# Altium PCB 3 motors 1 board.PcbDoc (part 1 of 2)
Units mil, origin at the board's own origin, x right, y up, seen from the top; angles counter-clockwise.
Board outline 3920 x 3290 mil, 4 copper layers (Top Layer, GND, PWR, Bottom Layer), stack 37.817 mil thick; 72 components, 81 nets, 316 pads, 112 vias.
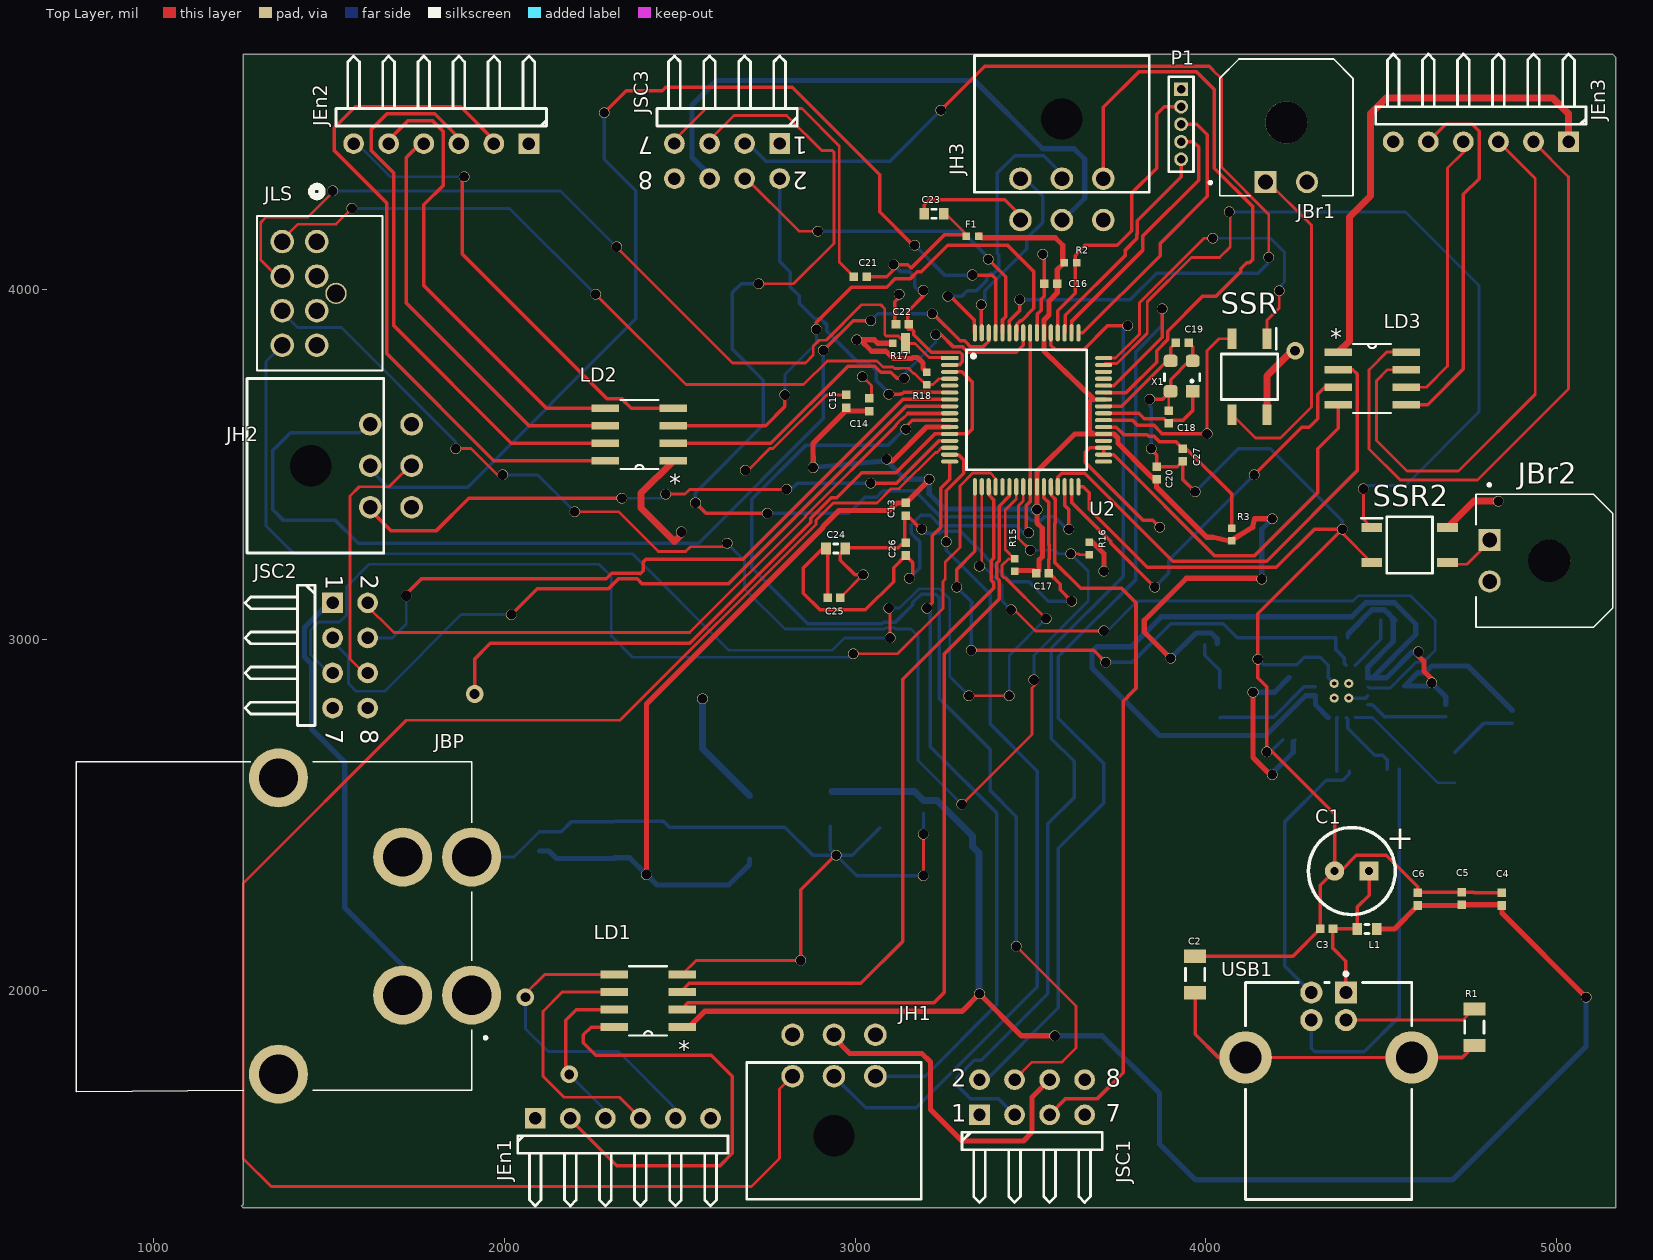
[diagram p0: Top Layer view]
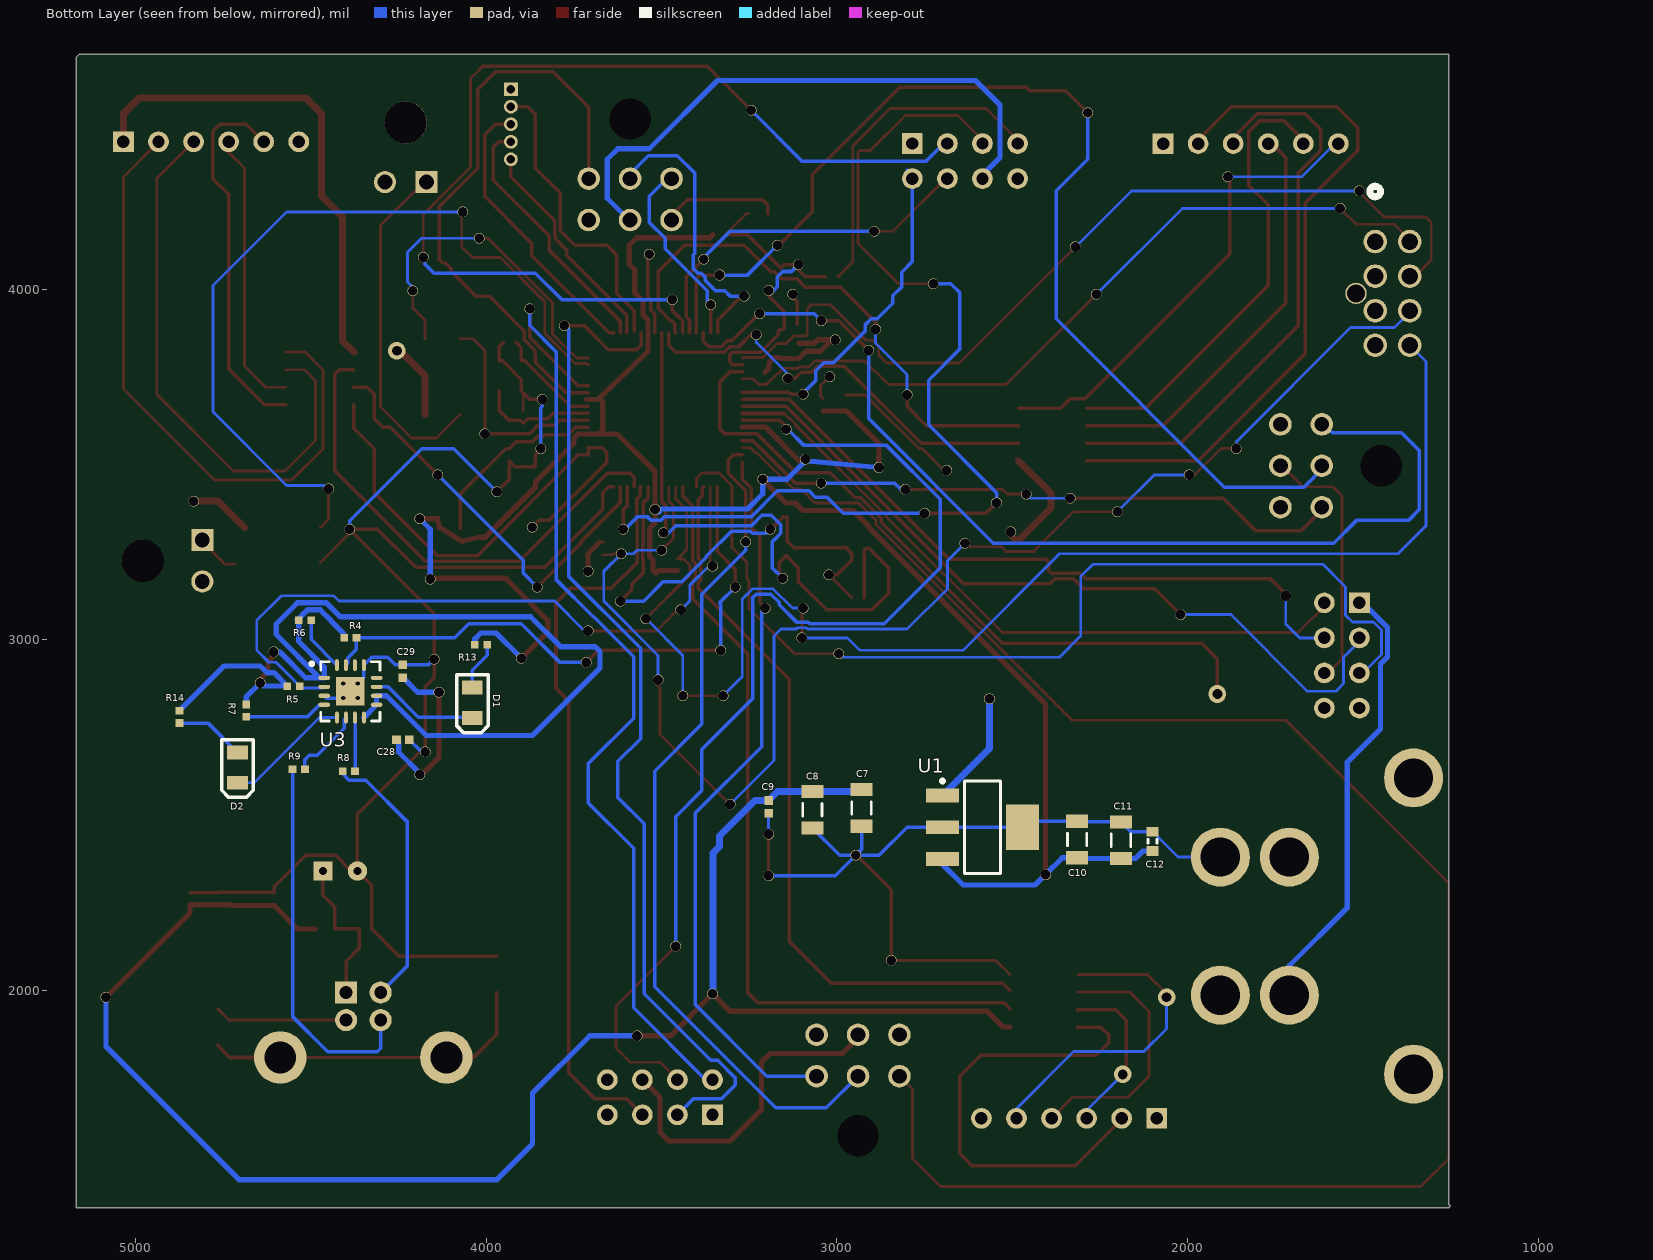
[diagram p1: Bottom Layer view, seen from below]
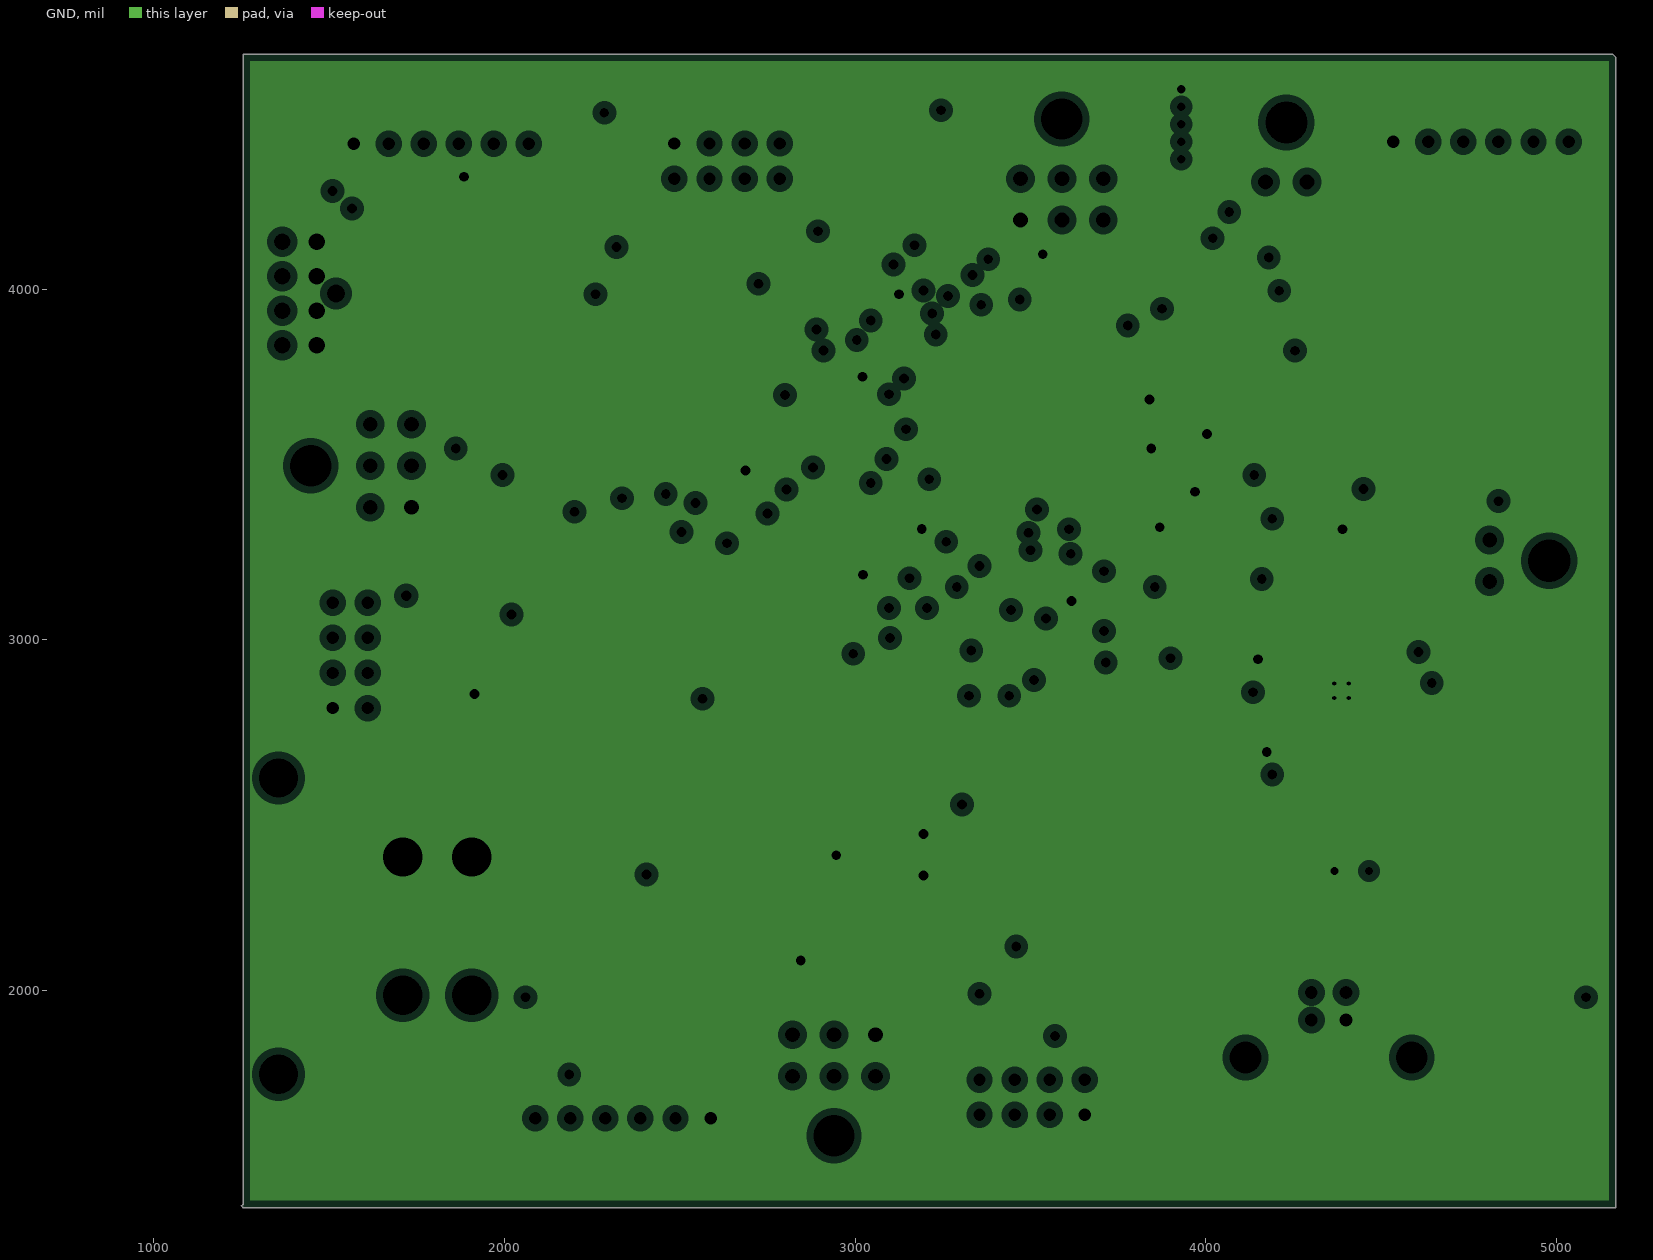
[diagram p2: GND, clearances drawn from the general rule]
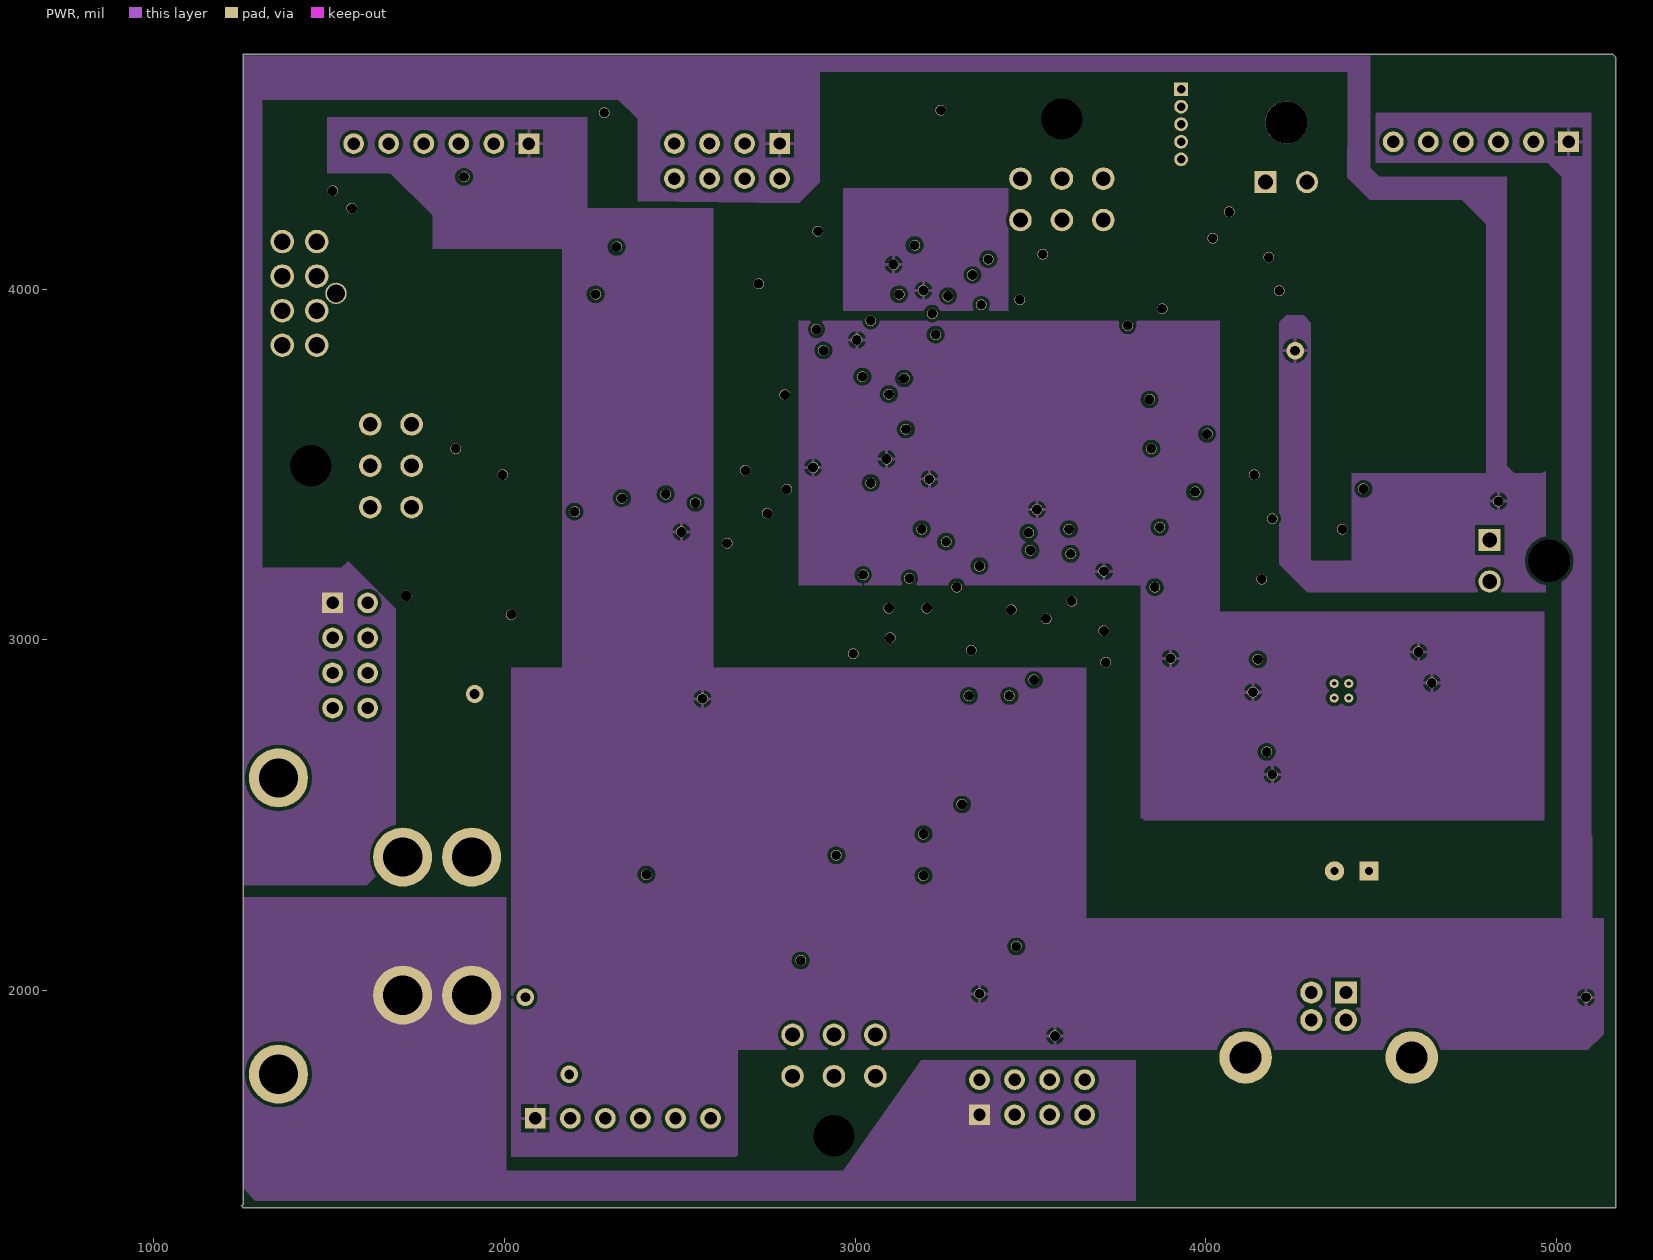
[diagram p3: PWR]
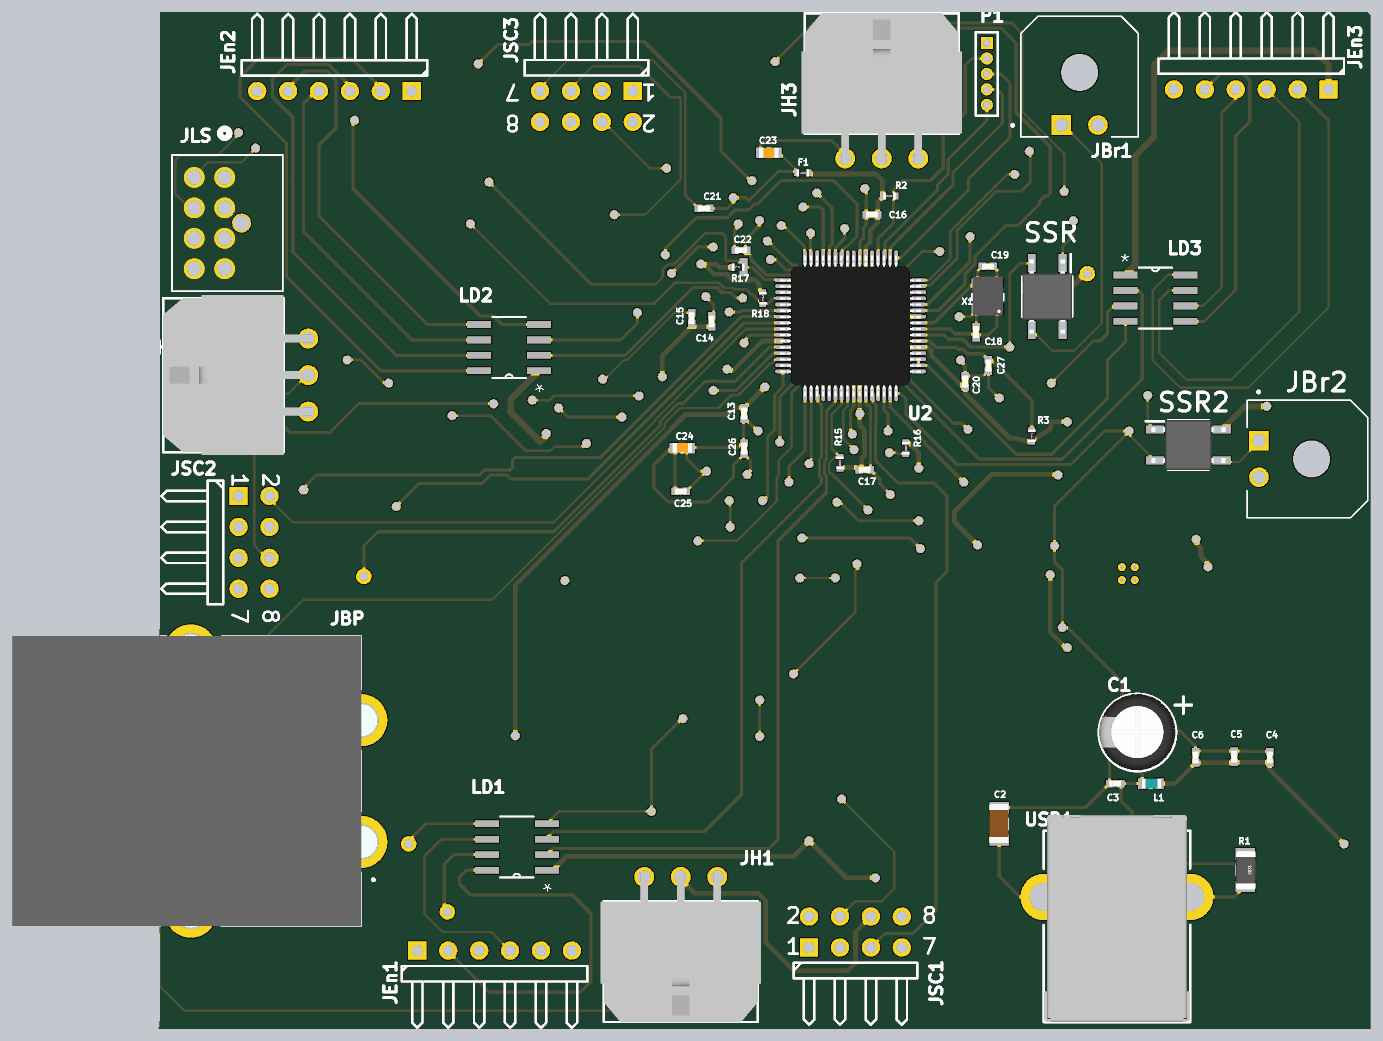
[diagram p5: 3D render of the assembled board from above, using the file's embedded part models]
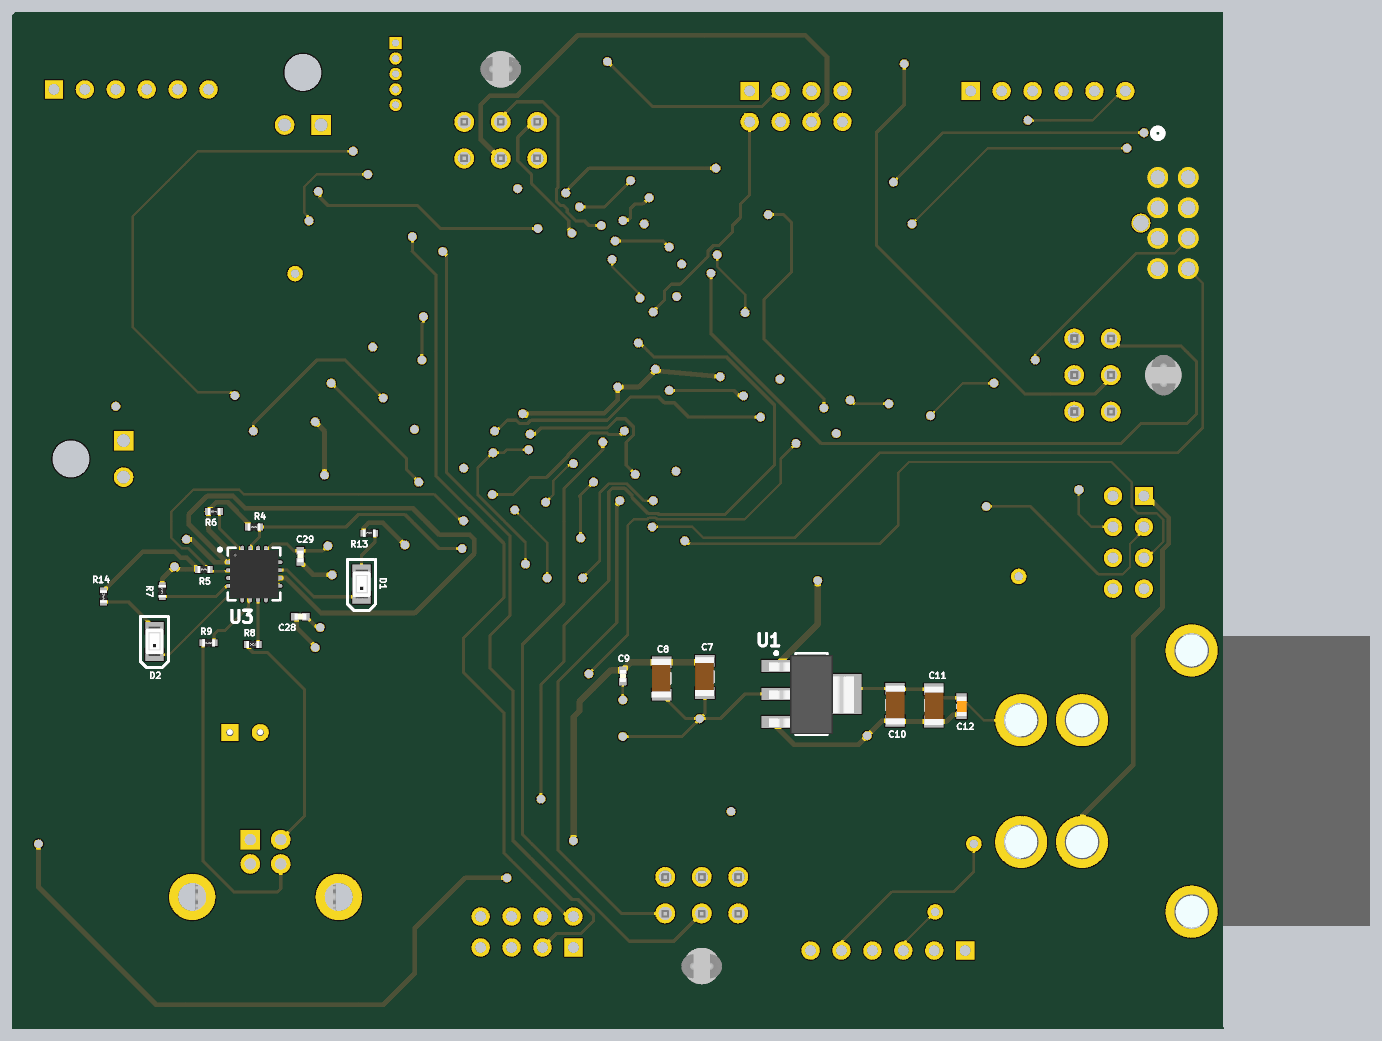
[diagram p6: 3D render of the assembled board from below, using the file's embedded part models]

## Layer stack, top to bottom
Top Solder: solder mask 0.4, Solder Resist, Dk 3.5
Top Layer: signal copper 1.4
Dielectric 3: dielectric 10, Dk 4.2
GND: plane copper 1, net GND
Dielectric 1: dielectric 12.6, FR-4, Dk 4.8
PWR: signal copper 1.417
Dielectric 2: dielectric 10, Dk 4.2
Bottom Layer: signal copper 1.4
Bottom Solder: solder mask 0.4, Solder Resist, Dk 3.5

## Board outline
1255,4670 5160,4670 5170,4660 5170,1380 1255,1380 1250,1385 1255,1390

## Design rules (kind name [scope] priority, off if disabled: settings)
Clearance Clearance_1 [All] p1: gap=10 ignorepadtopadclearanceinfootprint=TRUE except(0: Arc-Hole Track-Hole SMDPad-Hole THPad-Hole Via-Hole Fill-Hole Poly-Hole Region-Hole Text-Hole; 6: Arc-Arc Arc-Track Arc-SMDPad Arc-THPad Track-Track Track-SMDPad Track-THPad SMDPad-SMDPad SMDPad-THPad THPad-THPad)
Clearance [All] p2: gap=10 ignorepadtopadclearanceinfootprint=TRUE except(0: Arc-Hole Track-Hole SMDPad-Hole THPad-Hole Via-Hole Fill-Hole Poly-Hole Region-Hole Text-Hole; 6: Arc-Arc Arc-Track Arc-SMDPad Arc-THPad Track-Track Track-SMDPad Track-THPad SMDPad-SMDPad SMDPad-THPad THPad-THPad)
MinimumSolderMaskSliver [All] p1: minsoldermaskwidth=2
PlaneClearance [All] p1: clearance=20
PlaneConnect [All] p1: planeconnectstyle=Relief reliefexpansion=10 reliefentries=4 reliefconductorwidth=10 reliefairgap=8
PolygonConnect PolygonConnect_2 [All vs IsNamedPolygon('PWR-+24V')] p1: connectstyle=Direct reliefconductorwidth=10 reliefentries=4 polygonreliefangle="90 Angle" airgapwidth=10
PolygonConnect PolygonConnect_1 [All vs IsNamedPolygon('PWR-+24V 1')] p2: connectstyle=Direct reliefconductorwidth=10 reliefentries=4 polygonreliefangle="90 Angle" airgapwidth=10
PolygonConnect [All] p3: connectstyle=Relief reliefconductorwidth=10 reliefentries=4 polygonreliefangle="90 Angle" airgapwidth=10
RoutingVias [All] p1: holewidth=28 width=30 viastyle="Through Hole" minholewidth=28 minwidth=30 maxholewidth=28 maxwidth=50
SilkToSilkClearance [All] p1: silktosilkclearance=2
SilkToSolderMaskClearance [IsPad] p1: minsilkscreentomaskgap=2 clearancetoexposedcopper=TRUE
SolderMaskExpansion [All] p1: expansion=4
Width [All] p1: maxlimit=20 minlimit=6 preferedwidth=10 toplayer_prefwidth=8 midlayer1_minwidth=10 bottomlayer_prefwidth=8 minimp=50.000000 maximp=50.000000 favimp=50.000000
25 further rules are at their usual default settings.

## Components (designator, comment, footprint, x,y, rotation, side; value= is the part's Value field where it differs from the comment)
C1 "100uF" CapAlu6.3mmx12.5mm 4416.89,2340 r0 top
C2 "10nF" CAP_1206 3970,2045 r270 top
C3 "10nF" CAP_0402_M 4345,2175 r0 top
C4 "100nF" CAP_0402_M 4845,2260 r270 top
C5 "2.2uF" CAP_0402_M 4730,2261.89 r270 top
C6 "2.2uF" CAP_0402_M 4605,2260 r270 top
C7 "100uF" CAP_1206 2930,2520 r270 bottom
C8 "100uF" CAP_1206 3070,2515 r270 bottom
C9 "1uF" CAP_0402_M 3195,2523.11 r90 bottom
C10 "100uF" CAP_1206 2315,2430 r90 bottom
C11 "100uF" CAP_1206 2190,2427.83 r90 bottom
C12 "10uF" CAP_0603 2100,2425 r90 bottom
C13 "10nF" CAP_0402_M 3145,3371.89 r90 top
C14 "100nF" CAP_0402_M 3040,3670 r270 top
C15 "100nF" CAP_0402_M 2975,3680 r270 top
C16 "10nF" CAP_0402_M 3558.39,4015 r0 top
C17 "100nF" CAP_0402_M 3535,3190 r180 top
C18 "13pF" CAP_0402_M 3895,3635 r270 top
C19 "13pF" CAP_0402_M 3933.11,3847.4 r180 top
C20 "100nF" CAP_0402_M 3860,3475 r270 top
C21 "10nF" CAP_0402_M 3015,4035 r0 top
C22 "100nF" CAP_0402_M 3134.92,3900 r0 top
C23 "10uF" CAP_0603 3225,4215 r0 top
C24 "2.2uF" CAP_0603 2945,3260 r180 top
C25 "1uF" CAP_0402_M 2940,3120 r180 top
C26 "100nF" CAP_0402_M 3145,3258.11 r270 top
C27 "100nF" CAP_0402_M 3935,3526.89 r90 top
C28 "100nF" CAP_0402_M 4238.11,2715 r0 bottom
C29 "100nF" CAP_0402_M 4238.11,2910 r270 bottom
D1 "Led Red" "TOPLED 0805" 4040,2820 r270 bottom
D2 "Led Red" "TOPLED 0805" 4710,2635 r270 bottom
F1 "550mA" RES_0402_M#1 3335,4150 r180 top
JBP "42820-2224" 428202224 1906.85,1986.3 r270 top
JBr1 "436500200" MOLEX_436500200 4230.04,4461.22 r180 top
JBr2 "436500200" MOLEX_436500200 4966.22,3225 r90 top
JEn1 "EN_A" HDR1X6H 2088,1635 r0 top
JEn2 "EN_A" HDR1X6H 2070,4414.68 r180 top
JEn3 "EN_A" HDR1X6H 5035,4420 r180 top
JH1 "43045-0600" 43045-0600 2940,1585 r0 top
JH2 "43045-0600" 43045-0600 1447.13,3495.98 r270 top
JH3 "43045-0600" 43045-0600 3590,4484.88 r180 top
JLS "105310-1108" 105310-1108_MOL 1465,4135.28 r270 top
JSC1 "43045-0800" HDR2X4H 3355,1645 r0 top
JSC2 "43045-0800" HDR2X4H 1510,3105 r270 top
JSC3 "43045-0800" HDR2X4H 2785,4415 r180 top
L1 "200R" IND_0603 4460,2175 r0 top
LD1 "SN75LBC179D" D8 2410,1970 r180 top
LD2 "SN75LBC179D" D8 2385,3585 r180 top
LD3 "SN75LBC179D" D8 4475,3745 r0 top
P1 "MHDR1X5" MHDR1X5 3930,4570 r270 top
R1 "1M" RES_1206 4766.22,1895 r270 top
R2 "10k" RES_0402_M#1 3615,4075 r0 top
R3 "10k" RES_0402_M#1 4075,3300 r90 top
R4 "10k" RES_0402_M#1 4388.11,3005 r0 bottom
R5 "10k" RES_0402_M#1 4550,2867.65 r0 bottom
R6 "10k" RES_0402_M#1 4517.28,3055 r0 bottom
R7 "10k" RES_0402_M#1 4685,2797.28 r90 bottom
R8 "27" RES_0402_M#1 4392.28,2625 r180 bottom
R9 "27" RES_0402_M#1 4535,2630 r180 bottom
R13 "120" RES_0402_M#1 4015,2985 r0 bottom
R14 "120" RES_0402_M#1 4875,2780 r90 bottom
R15 "150" RES_0402_M#1 3455,3212.76 r270 top
R16 "150" RES_0402_M#1 3667.72,3260 r90 top
R17 "150" RES_0402_M#2 3125.84,3845 r180 top
R18 "150" RES_0402_M#1 3205,3745 r90 top
SSR "CPC1017NTR" SOP254P610X216-4N 4125,3750 r270 top
SSR2 "CPC1017NTR" SOP254P610X216-4N 4581.73,3270 r0 top
U1 "MCP1825S-3302E/DB" SOT230P700X180-4N 2585,2465 r180 bottom
U2 "TM4C123GH6PMI" TSQFP50P1200X1200X120-64N 3341.85,3875 r0 top
U3 "FT230XQ" QFN65P400X400X80_HS-17N 4387.79,2852.67 r180 bottom
USB1 "USB type-B jack" USB2.5-2H4E 4350.79,1954.37 r270 top
X1 "CRYSTAL 16MHZ" CRYSTAL_3.2x2.5 3962.99,3708.39 r180 top

## Footprints (in the part's own frame and the unit in brackets; to place one, negate y for a bottom-side part, rotate by r counter-clockwise, add the part's x,y. Pads: shape width x height; smd on the part's side, far side on the other; paste and mask are expansions set on the pad)
43045-0600 [mm]
  round 1.63 hole 1.07: 1(-3,4.32) 2(0,4.32) 3(3,4.32) 4(3,7.32) 5(0,7.32) 6(-3,7.32)
  round 0 hole 3 unplated: 7(0,0)
  silkscreen extent -6.32,-4.6 6.32,5.31, body extent -6.58,-4.62 6.58,7.62, height 8.66
105310-1108_MOL [mil]
  round 67 hole 47 mask+0: 1(0,0) 2(98.43,0) 3(196.85,0) 4(295.28,0) 5(0,-98.43) 6(98.43,-98.43) 7(196.85,-98.43) 8(295.28,-98.43)
  round 61 hole 51: 9(147.64,54.72)
  silkscreen extent -158,-170 368,188, body extent 0,0 10,10, height 10
428202224 [mm]
  round 4.275 hole 2.85: 1(0,0) 2(0,-5) 3(-10,0) 4(-10,-5) MH1(-15.73,-14) MH2(5.73,-14)
  silkscreen extent -16.91,-28.66 7,1.1, body extent -17.04,-28.66 7.06,1.32, height 14.2
CAP_0402_M [mm] "Chip Capacitor, 2-Leads, Body 1.00x0.50mm, IPC Medium Density"
  rect 0.62x0.62 smd: 1(-0.46,0) 2(0.46,0)
  body extent -0.5,-0.26 0.5,0.27, height 0.36
CAP_0603 [mm] "Chip Capacitor, 2-Leads, Body 1,6x0,8mm, IPC High Density"
  rect 0.7x0.85 smd: 1(-0.7,0) 2(0.7,0)
  silkscreen extent -0.15,-0.33 0.15,0.33, body extent -0.8,-0.42 0.8,0.38, height 0.7
CAP_1206 [mm] "Chip Capacitor, 2-Leads, Body 3,1x1,6mm, IPC High Density"
  rect 0.95x1.6 smd: 1(-1.325,0) 2(1.325,0)
  silkscreen extent -0.45,-0.7 0.45,0.7, body extent -1.62,-0.82 1.57,0.78, height 1.6
CapAlu6.3mmx12.5mm [mm] "Capacitor Aluminum 6.3mm OD"
  rect 1.4x1.4 hole 0.6: 1(1.25,0)
  round 1.4 hole 0.6: 2(-1.25,0)
  silkscreen extent -3.15,-3.15 3.15,3.15, body extent -3.15,-3.11 3.15,3.19, height 12
CRYSTAL_3.2x2.5 [mm]
  rect 1x0.9 smd: 1(0,0)
  rrect50% 1x0.9 smd: 2(0,-2.2) 3(1.6,-2.2) 4(1.6,0)
  silkscreen extent -0.51,-1.27 2.03,-0.69, body extent -0.5,-2.7 2,0.5, height 0.93
D8 [mil]
  rect 78x22 smd: 1(-97,75) 2(-97,25) 3(-97,-25) 4(-97,-75) 5(97,-75) 6(97,-25) 7(97,25) 8(97,75)
  silkscreen extent -54,-98 54,98, body extent 0,0 10,10, height 10
HDR1X6H [mm] "Connector; Header; 6 Position; Right Angle"
  rect 1.5x1.5 hole 0.9: 1(0,0)
  round 1.5 hole 0.9: 2(2.54,0) 3(5.08,0) 4(7.62,0) 5(10.16,0) 6(12.7,0)
  silkscreen extent -1.27,-6.35 13.97,-1.27
HDR2X4H [mm] "Connector; Header; 4x2 Position; Right Angle"
  rect 1.5x1.5 hole 0.9: 1(0,0)
  round 1.5 hole 0.9: 2(0,2.54) 3(2.54,0) 4(2.54,2.54) 5(5.08,0) 6(5.08,2.54) 7(7.62,0) 8(7.62,2.54)
  silkscreen extent -1.27,-6.35 8.89,-1.27
IND_0603 [mm]
  rect 0.7x0.85 smd: 1(-0.7,0) 2(0.7,0)
  silkscreen extent -0.15,-0.33 0.15,0.33, body extent -0.74,-0.4 0.86,0.4, height 0.95
MHDR1X5 [mm] "Connector; Header; 5 Position"
  rect 1x1 hole 0.6: 1(0,0)
  round 1 hole 0.6: 2(1.27,0) 3(2.54,0) 4(3.81,0) 5(5.08,0)
  silkscreen extent -0.9,-0.9 5.98,0.9
MOLEX_436500200 [mm]
  rect 1.605x1.605 hole 1.07: 1(1.5,3.97)
  round 1.605 hole 1.07: 2(-1.5,3.97)
  round 3.05 hole 3.05 unplated: ""(0,-0.35)
  silkscreen extent -4.82,-4.95 5.6,4.95
QFN65P400X400X80_HS-17N [mm] "QFN, 16-Leads, Body 4.00x4.00mm, Pitch 0.65mm, Thermal Pad 2.08x2.08mm, IPC Medium Density"
  oval 0.85x0.3 smd: 1(-1.9,0.975) 2(-1.9,0.325) 3(-1.9,-0.325) 4(-1.9,-0.975) 9(1.9,-0.975) 10(1.9,-0.325) 11(1.9,0.325) 12(1.9,0.975)
  oval 0.3x0.85 smd: 5(-0.975,-1.9) 6(-0.325,-1.9) 7(0.325,-1.9) 8(0.975,-1.9) 13(0.975,1.9) 14(0.325,1.9) 15(-0.325,1.9) 16(-0.975,1.9)
  round 0.66 hole 0.305: 17(-0.516,-0.493) 17(-0.516,0.567) 17(0.538,-0.493) 17(0.538,0.567)
  rect 2.08x2.08 smd: 17(0,0)
  silkscreen extent -2.93,-2.15 2.15,2.15, body extent -2,-2 2,2, height 0.92
RES_0402_M#1 [mm] "Chip Resistor, 2-Leads, Body 1.00x0.50mm, IPC Medium Density"
  rect 0.55x0.55 smd: 1(-0.45,0) 2(0.45,0)
  body extent -0.52,-0.3 0.52,0.3, height 0.34
RES_0402_M#2 [mm] "Chip Resistor, 2-Leads, Body 1.00x0.50mm, IPC Medium Density"
  rect 0.65x1.5 smd: 1(-0.45,0)
  rect 0.55x0.55 smd: 2(0.45,0)
  body extent -0.52,-0.3 0.52,0.3, height 0.34
RES_1206 [mm] "Chip Resistor 2-Leads, Body 3,1x1,6mm, IPC High Density"
  rect 0.95x1.6 smd: 1(-1.325,0) 2(1.325,0)
  silkscreen extent -0.45,-0.7 0.45,0.7, body extent -1.59,-0.76 1.61,0.84, height 1
SOP254P610X216-4N [mm]
  rect 1.5x0.65 smd: 1(-2.75,1.27) 2(-2.75,-1.27) 3(2.75,-1.27) 4(2.75,1.27)
  silkscreen extent -3.5,-2.04 1.65,2.04, body extent -3.05,-2.04 3.05,2.04, height 2.16
SOT230P700X180-4N [mm] "SOT223, 4-Leads, Body 6,7x7,3mm (max), Pitch 2,30mm, IPC Medium Density"
  rect 2.4x1 smd: 1(-2.9,2.3) 2(-2.9,0) 3(-2.9,-2.3)
  rect 2.4x3.3 smd: 4(2.9,0)
  silkscreen extent -3.03,-3.35 1.3,3.47, body extent -3.5,-3.3 3.5,3.2, height 1.69
"TOPLED 0805" [mm]
  rect 1x1.5 smd: 1(-1.1,0) 2(1.1,0)
  silkscreen extent -2.03,-1.14 2.16,1.14, body extent -1.2,-0.74 1.2,0.76, height 1.45
TSQFP50P1200X1200X120-64N [mm] "TSQFP, 64-Leads, Body 12,0x12,0mm (max), Pitch 0,50mm, IPC Medium Density"
  rect 1.25x0.3 smd: 1(-1.825,-1.825)
  oval 1.25x0.3 smd: 2(-1.825,-2.325) 3(-1.825,-2.825) 4(-1.825,-3.325) 5(-1.825,-3.825) 6(-1.825,-4.325) 7(-1.825,-4.825) 8(-1.825,-5.325) 9(-1.825,-5.825) 10(-1.825,-6.325) 11(-1.825,-6.825) 12(-1.825,-7.325) 13(-1.825,-7.825) 14(-1.825,-8.325) 15(-1.825,-8.825) 16(-1.825,-9.325) 33(9.325,-9.325) 34(9.325,-8.825) 35(9.325,-8.325) 36(9.325,-7.825) 37(9.325,-7.325) 38(9.325,-6.825) 39(9.325,-6.325) 40(9.325,-5.825) 41(9.325,-5.325) 42(9.325,-4.825) 43(9.325,-4.325) 44(9.325,-3.825) 45(9.325,-3.325) 46(9.325,-2.825) 47(9.325,-2.325) 48(9.325,-1.825)
  oval 0.3x1.25 smd: 17(0,-11.15) 18(0.5,-11.15) 19(1,-11.15) 20(1.5,-11.15) 21(2,-11.15) 22(2.5,-11.15) 23(3,-11.15) 24(3.5,-11.15) 25(4,-11.15) 26(4.5,-11.15) 27(5,-11.15) 28(5.5,-11.15) 29(6,-11.15) 30(6.5,-11.15) 31(7,-11.15) 32(7.5,-11.15) 49(7.5,0) 50(7,0) 51(6.5,0) 52(6,0) 53(5.5,0) 54(5,0) 55(4.5,0) 56(4,0) 57(3.5,0) 58(3,0) 59(2.5,0) 60(2,0) 61(1.5,0) 62(1,0) 63(0.5,0) 64(0,0)
  silkscreen extent -0.6,-9.92 8.1,-1.22, body extent -2.05,-11.38 9.53,0.2, height 1
USB2.5-2H4E [mm] "Connector; USB1.1, Type B, Thru-Hole; 4 Position; Right Angle"
  rect 1.6x1.6 hole 0.92: 1(-1,1.25)
  round 1.6 hole 0.92: 2(-1,-1.25) 3(1,-1.25) 4(1,1.25)
  round 3.8 hole 2.3: 5(3.71,6.02) 6(3.71,-6.02)
  silkscreen extent -2.47,-6.02 13.99,6.02, body extent -3.03,-6 13.97,6, height 10.9

## Part data
C1: library part 100uF_35v_6.3x12.5, "Capacitor 35v 100uF 6.3mm", Capacitance=100µF, ESR (Equivalent Series Resistance)=-, Lifetime @ Temp.="5000 Hrs @ 105°C", Manufacturer=Nichicon, Manufacturer Part Number=UHV1V101MED, Operating Temperature="-40°C ~ 105°C", Package / Case="Radial, Can", Ripple Current="220mA @ 120Hz", Supplier Part Number 1=493-13394-ND, Tolerance=±20%, Voltage Rating=35V, Applications="General Purpose", Category=Capacitors, ComponentLink1Description=http://nichicon-us.com/english/products/pdfs/e-uhv.pdf, ComponentLink1URL=http://nichicon-us.com/english/products/pdfs/e-uhv.pdf, Height - Seated (Max)="0.492\" (12.50mm)", Impedance="100 mOhm", Lead Spacing="0.098\" (2.50mm)", Mounting Type="Through Hole", Packaging=Bulk, Polarization=Polar, Pricing 1="1=0.46, 10=0.32, 25=0.262, 50=0.224, 100=0.1919, 250=0.15992, 500=0.14394, 1000=0.12155, 2500=0.11515 (CAD)", RoHS="RoHS Compliant", Size / Dimension="0.248\" Dia (6.30mm)", Stock 1=5561, Supplier 1=Digi-Key, Surface Mount Land Size=-
C2: library part 10nF_500V_1206, "CAP CER 10000PF 500V X7R 1206", Capacitance=10000pF, Manufacturer="Samsung Electro-Mechanics America, Inc", Manufacturer Part Number=CL31B103KGFNNNE, Operating Temperature="-55°C ~ 125°C", Package / Case="1206 (3216 Metric)", Ratings=-, Supplier Part Number 1=1276-3076-1-ND, Temperature Coefficient=X7R, Tolerance=±10%, Voltage - Rated=500V, Applications="General Purpose", Category=Capacitors, ComponentLink1Description=http://www.samsungsem.com/kr/front/downloadcms.do?path=/kr/support/product-search/mlcc/__icsFiles/afieldfile/2014/11/05&fileName=S_CL31B103KGFNNNE.pdf, ComponentLink1URL=http://www.samsungsem.com/kr/front/downloadcms.do?path=/kr/support/product-search/mlcc/__icsFiles/afieldfile/2014/11/05&fileName=S_CL31B103KGFNNNE.pdf, Features=-, Height - Seated (Max)=-, Lead Spacing=-, Lead Style=-, Mounting Type="Surface Mount, MLCC", Packaging="Cut Tape (CT)", Pricing 1="1=0.34, 10=0.28, 25=0.192, 100=0.1398, 500=0.09266, 1000=0.08216 (CAD)", RoHS="RoHS Compliant", Size / Dimension="0.126\" L x 0.063\" W (3.20mm x 1.60mm)", Stock 1=9075, Supplier 1=Digi-Key, Thickness (Max)="0.055\" (1.40mm)"
C3 C13 C16 C21: library part 10nF_50V_0402, "CAP CER 10000PF 50V 10% X7R 0402", Capacitance=10000pF, Manufacturer=Kemet, Manufacturer Part Number=C0402C103K5RACTU, Operating Temperature="-55°C ~ 125°C", Package / Case="0402 (1005 Metric)", Ratings=-, Supplier Part Number 1=399-3066-1-ND, Temperature Coefficient=X7R, Tolerance=±10%, Voltage - Rated=50V, Applications="General Purpose", Category=Capacitors, ComponentLink1Description=http://www.kemet.com/docfinder?Partnumber=C0402C103K5RACTU, ComponentLink1URL=http://www.kemet.com/docfinder?Partnumber=C0402C103K5RACTU, Features=-, Height - Seated (Max)=-, Lead Spacing=-, Lead Style=-, Mounting Type="Surface Mount, MLCC", Packaging="Cut Tape (CT)", Pricing 1="1=0.14, 10=0.037, 25=0.026, 50=0.0198, 100=0.0166, 250=0.01364, 1000=0.00893, 2500=0.00804, 5000=0.00744 (CAD)", RoHS="RoHS Compliant", Size / Dimension="0.039\" L x 0.020\" W (1.00mm x 0.50mm)", Stock 1=3556921, Supplier 1=Digi-Key, Thickness (Max)="0.022\" (0.55mm)"
C4 C14 C15 C17 C20 C22 C26 C27 C28 C29: library part 100nF_50V_0402, "CAP CER 100NF 50V 20% X5R 0402", Capacitance=0.1µF, Manufacturer="TDK Corporation", Manufacturer Part Number=C1005X5R1H104M050BB, Operating Temperature="-55°C ~ 85°C", Package / Case="0402 (1005 Metric)", Ratings=-, Supplier Part Number 1=445-5943-1-ND, Temperature Coefficient=X5R, Tolerance=±20%, Voltage - Rated=50V, Applications="General Purpose", Category=Capacitors, ComponentLink1Description=http://product.tdk.com/en/catalog/datasheets/mlcc_commercial_general_en.pdf, ComponentLink1URL=http://product.tdk.com/en/catalog/datasheets/mlcc_commercial_general_en.pdf, Features=-, Height - Seated (Max)=-, Lead Spacing=-, Lead Style=-, Mounting Type="Surface Mount, MLCC", Packaging="Cut Tape (CT)", Pricing 1="1=0.18, 10=0.122, 100=0.0579, 250=0.04872, 500=0.0408, 1000=0.03348, 5000=0.02831 (CAD)", RoHS="RoHS Compliant", Size / Dimension="0.039\" L x 0.020\" W (1.00mm x 0.50mm)", Stock 1=218263, Supplier 1=Digi-Key, Thickness (Max)="0.022\" (0.55mm)"
C5 C6: library part 2.2uF_10V_0402, "CAP CER 2.2UF 10V 20% X5R 0402", Capacitance=2.2µF, Manufacturer="Taiyo Yuden", Manufacturer Part Number=LMK105BJ225MV-F, Operating Temperature="-55°C ~ 85°C", Package / Case="0402 (1005 Metric)", Ratings=-, Supplier Part Number 1=587-3153-1-ND, Temperature Coefficient=X5R, Tolerance=±20%, Voltage - Rated=10V, Applications="General Purpose", Category=Capacitors, ComponentLink1Description=http://www.yuden.co.jp/ut/product/category/capacitor/LMK105BJ225MV-F.pdf, ComponentLink1URL=http://www.yuden.co.jp/ut/product/category/capacitor/LMK105BJ225MV-F.pdf, Features=-, Height - Seated (Max)=-, Lead Spacing=-, Lead Style=-, Mounting Type="Surface Mount, MLCC", Packaging="Cut Tape (CT)", Pricing 1="1=0.26, 10=0.173, 50=0.105, 100=0.0881, 250=0.07132, 500=0.0629, 1000=0.05348, 2500=0.04928, 5000=0.04509 (CAD)", RoHS="RoHS Compliant", Size / Dimension="0.039\" L x 0.020\" W (1.00mm x 0.50mm)", Stock 1=258065, Supplier 1=Digi-Key, Thickness (Max)="0.022\" (0.55mm)"
C7 C8 C10 C11: library part 100uF_6.3v_1206_X5R, "CAP CER 100UF 6.3V X5R 1206", Capacitance=100µF, Manufacturer="Murata Electronics North America", Manufacturer Part Number=GRM31CR60J107ME39L, Operating Temperature="-55°C ~ 85°C", Package / Case="1206 (3216 Metric)", Ratings=-, Supplier Part Number 1=490-4539-1-ND, Temperature Coefficient=X5R, Tolerance=±20%, Voltage - Rated=6.3V, Applications="General Purpose", Category=Capacitors, ComponentLink1Description=http://www.murata.com/~/media/webrenewal/support/library/catalog/products/capacitor/mlcc/c02e.pdf, ComponentLink1URL=http://www.murata.com/~/media/webrenewal/support/library/catalog/products/capacitor/mlcc/c02e.pdf, Features=-, Height - Seated (Max)=-, Lead Spacing=-, Lead Style=-, Mounting Type="Surface Mount, MLCC", Packaging="Cut Tape (CT)", Pricing 1="1=1.23, 10=1.048, 50=0.771, 100=0.6128, 250=0.51396, 500=0.46456, 1000=0.42502 (CAD)", RoHS="RoHS Compliant", Size / Dimension="0.126\" L x 0.063\" W (3.20mm x 1.60mm)", Stock 1=450179, Supplier 1=Digi-Key, Thickness (Max)="0.071\" (1.80mm)"
C9 C25: library part 1uF_25V_0402, "CAP CER 1UF 25V 10% X5R 0402", Capacitance=1µF, Manufacturer="TDK Corporation", Manufacturer Part Number=C1005X5R1E105K050BC, Operating Temperature="-55°C ~ 85°C", Package / Case="0402 (1005 Metric)", Ratings=-, Supplier Part Number 1=445-9066-1-ND, Temperature Coefficient=X5R, Tolerance=±10%, Voltage - Rated=25V, Applications="General Purpose", Category=Capacitors, ComponentLink1Description=http://product.tdk.com/en/catalog/datasheets/mlcc_commercial_general_en.pdf, ComponentLink1URL=http://product.tdk.com/en/catalog/datasheets/mlcc_commercial_general_en.pdf, Features=-, Height - Seated (Max)=-, Lead Spacing=-, Lead Style=-, Mounting Type="Surface Mount, MLCC", Packaging="Cut Tape (CT)", Pricing 1="1=0.27, 10=0.185, 100=0.0878, 250=0.074, 500=0.06196, 1000=0.05087, 5000=0.04301 (CAD)", RoHS="RoHS Compliant", Size / Dimension="0.039\" L x 0.020\" W (1.00mm x 0.50mm)", Stock 1=310467, Supplier 1=Digi-Key, Thickness (Max)="0.022\" (0.55mm)"
C12 C23: library part 10uF_10V_0603, "CAP CER 10UF 10V 20% X5R 0603", Capacitance=10µF, Manufacturer="Taiyo Yuden", Manufacturer Part Number=LMK107BBJ106MAHT, Operating Temperature="-55°C ~ 85°C", Package / Case="0603 (1608 Metric)", Ratings=AEC-Q200, Supplier Part Number 1=587-3412-1-ND, Temperature Coefficient=X5R, Tolerance=±20%, Voltage - Rated=10V, Applications=Automotive, Category=Capacitors, ComponentLink1Description=http://www.yuden.co.jp/productdata/catalog/en/mlcc01_hq_e.pdf, ComponentLink1URL=http://www.yuden.co.jp/productdata/catalog/en/mlcc01_hq_e.pdf, Features=-, Height - Seated (Max)=-, Lead Spacing=-, Lead Style=-, Mounting Type="Surface Mount, MLCC", Packaging="Cut Tape (CT)", Pricing 1="1=0.5, 10=0.437, 50=0.266, 100=0.2189, 250=0.17516, 500=0.15952, 1000=0.14107 (CAD)", RoHS="RoHS Compliant", Size / Dimension="0.063\" L x 0.031\" W (1.60mm x 0.80mm)", Stock 1=90195, Supplier 1=Digi-Key, Thickness (Max)="0.035\" (0.90mm)"
C18 C19: library part 13pF_50V_0402, "CAP CER 13PF 50V 5% NP0 0402", Manufacturer="Samsung Electro-Mechanics America, Inc", Manufacturer Part Number=CL05C130JB5NNNC, Operating Temperature="-55°C ~ 125°C", Package / Case="0402 (1005 Metric)", Ratings=-, Supplier Part Number 1=1276-1642-1-ND, Temperature Coefficient="C0G, NP0", Tolerance=±5%, Voltage - Rated=50V, Applications="General Purpose", Capacitance=13pF, Category=Capacitors, ComponentLink1Description=http://www.samsungsem.com/kr/front/downloadcms.do?path=/kr/support/product-search/mlcc/__icsFiles/afieldfile/2014/11/05&fileName=S_CL05C130JB5NNNC.pdf, ComponentLink1URL=http://www.samsungsem.com/kr/front/downloadcms.do?path=/kr/support/product-search/mlcc/__icsFiles/afieldfile/2014/11/05&fileName=S_CL05C130JB5NNNC.pdf, Features=-, Height - Seated (Max)=-, Lead Spacing=-, Lead Style=-, Mounting Type="Surface Mount, MLCC", Packaging="Cut Tape (CT)", Pricing 1="1=0.14, 10=0.064, 25=0.0448, 100=0.0291, 500=0.02032, 1000=0.01583, 2500=0.01425, 5000=0.01319 (CAD)", RoHS="RoHS Compliant", Size / Dimension="0.039\" L x 0.020\" W (1.00mm x 0.50mm)", Stock 1=16490, Supplier 1=Digi-Key, Thickness (Max)="0.022\" (0.55mm)"
C24: library part 2.2uF_35V_0603, "CAP CER 2.2UF 35V 10% X5R 0603", Capacitance=2.2µF, Manufacturer="Murata Electronics North America", Manufacturer Part Number=GRM188R6YA225KA12D, Operating Temperature="-55°C ~ 85°C", Package / Case="0603 (1608 Metric)", Ratings=-, Supplier Part Number 1=490-7204-1-ND, Temperature Coefficient=X5R, Tolerance=±10%, Voltage - Rated=35V, Applications="General Purpose", Category=Capacitors, ComponentLink1Description=http://www.murata.com/~/media/webrenewal/support/library/catalog/products/capacitor/mlcc/c02e.ashx, ComponentLink1URL=http://www.murata.com/~/media/webrenewal/support/library/catalog/products/capacitor/mlcc/c02e.ashx, Features=-, Height - Seated (Max)=-, Lead Spacing=-, Lead Style=-, Mounting Type="Surface Mount, MLCC", Packaging="Cut Tape (CT)", Pricing 1="1=0.31, 10=0.214, 50=0.1298, 100=0.109, 250=0.08832, 500=0.07792, 1000=0.06624 (CAD)", RoHS="RoHS Compliant", Size / Dimension="0.063\" L x 0.031\" W (1.60mm x 0.80mm)", Stock 1=55248, Supplier 1=Digi-Key, Thickness (Max)="0.031\" (0.80mm)"
D1 D2: library part "TOPLED 0803", "LED TOPLED 630NM SUP RED CLR SMD", Color=Red, Current - Test=2mA, Luminous Flux @ Current - Test="25 mlm", Manufacturer="OSRAM Opto Semiconductors Inc", Manufacturer Part Number="LS M67K-H2L1-1-Z", Millicandela Rating=8.78mcd, Package / Case="2-SMD, J-Lead", Supplier Part Number 1=475-2510-1-ND, Voltage - Forward (Vf) (Typ)=1.8V, Category=Optoelectronics, ComponentLink1Description=http://media.digikey.com/pdf/Data%20Sheets/Osram%20PDFs/LS,LO,LY_M67K.pdf, ComponentLink1URL=http://media.digikey.com/pdf/Data%20Sheets/Osram%20PDFs/LS,LO,LY_M67K.pdf, Height=1.30mm, Lens Style/Size="Rectangle with Flat Top, 1.5mm x 1mm", Lens Type=Clear, Mounting Type="Surface Mount", Packaging="Cut Tape (CT)", Pricing 1="1=0.19, 10=0.162, 100=0.1295, 250=0.11328, 500=0.10354 (CAD)", RoHS="RoHS Compliant", Size / Dimension="2.20mm L x 1.40mm W", Stock 1=23262, Supplier 1=Digi-Key, Viewing Angle=120°, Wavelength - Dominant=630nm, Wavelength - Peak=643nm
F1: library part 40O_550mA_0402, "FERRITE CHIP 40 OHM 550MA 0402", DC Resistance (DCR)="120 mOhm Max", Impedance @ Frequency="40 Ohm @ 100MHz", Manufacturer="TDK Corporation", Manufacturer Part Number=MMZ1005Y400CT000, Package / Case="0402 (1005 Metric)", Supplier Part Number 1=445-2150-1-ND, Category=Filters, ComponentLink1Description=http://product.tdk.com/emc/beads/en/documents/beads_commercial_signal_mmz_en.pdf, ComponentLink1URL=http://product.tdk.com/emc/beads/en/documents/beads_commercial_signal_mmz_en.pdf, Current Rating=550mA, Filter Type="Differential Mode - Single", Height (Max)="0.022\" (0.55mm)", Mounting Type="Surface Mount", Packaging="Cut Tape (CT)", Pricing 1="1=0.14, 10=0.099, 100=0.059, 250=0.04284, 500=0.03928, 1000=0.03393, 5000=0.02679 (CAD)", RoHS="RoHS Compliant", Size / Dimension="0.039\" L x 0.020\" W (1.00mm x 0.50mm)", Stock 1=1706, Supplier 1=Digi-Key
JBP: "Connector", Manufacturer_Name=Molex, Mouser Part Number=538-42820-2224, Datasheet Link=https://componentsearchengine.com/Datasheets/1/42820-2224.pdf, Height=14.1mm, Manufacturer_Part_Number=42820-2224, Mouser Price/Stock=https://www.mouser.com/Search/Refine.aspx?Keyword=538-42820-2224
JBr1 JBr2: "Connector Header Through Hole, Right Angle 2 position 0.118 (3.00mm)", Package=None, Availability=Warning, MF=Molex, MP=436500200, Price=None, SnapEDA_Link=https://www.snapeda.com/parts/436500200/Molex/view-part/4523841/?ref=snap
JEn1 JEn2 JEn3: library part 105309-1106, "Connector", Manufacturer_Name=Molex, Datasheet Link=https://rs.componentsearchengine.com/Datasheets/2/105309-1106.pdf, Height=10.71mm, Manufacturer_Part_Number=105309-1106
JH1 JH2 JH3: "Connector", Manufacturer_Name=Molex, Mouser Part Number=538-43045-0600, Arrow Part Number=43045-0600, Arrow Price/Stock=https://www.arrow.com/en/products/43045-0600/molex, Datasheet Link=https://www.molex.com/pdm_docs/sd/430452227_sd.pdf, Manufacturer_Part_Number=43045-0600, Mouser Price/Stock=https://www.mouser.co.uk/ProductDetail/Molex/43045-0600?qs=mrPiglD9aYJ8CzJ%2FE2PNbw%3D%3D
JLS: "No Description Available", Built_By=EMA_Colton, Copyright="Copyright (C) 2018 Accelerated Designs. All rights reserved", Datasheet=https://www.molex.com/pdm_docs/sd/1053101210_sd.pdf, Manufacturer_Part_Number=105310-1108, RefDes=RefDes, SourceLibrary=Molex_Connector_corporation_2020-02-27, Type=DEV, Vendor="Molex Connector Corporation"
JSC1 JSC2 JSC3: "Connector", Manufacturer_Name=Molex, Mouser Part Number=538-43045-0800, Datasheet Link=https://componentsearchengine.com/Datasheets/2/43045-0800.pdf, Manufacturer_Part_Number=43045-0800, Mouser Price/Stock=https://www.mouser.co.uk/ProductDetail/Molex/43045-0800?qs=MGlPTwjtJ4Z70Z3DbkGxKw%3D%3D
L1: library part "Ferrite_200 ohms_2A", "FILTER CHIP 220 OHM 2A 0603", Current Rating=2A, DC Resistance (DCR)="50 mOhm Max", Impedance @ Frequency="220 Ohm @ 100MHz", Manufacturer="Murata Electronics North America", Manufacturer Part Number=BLM18EG221SN1D, Package / Case="0603 (1608 Metric)", Supplier Part Number 1=490-3992-1-ND, Category=Filters, ComponentLink1Description=http://search.murata.co.jp/Ceramy/image/img/PDF/ENG/L0110S0101BLM18E.pdf, ComponentLink1URL=http://search.murata.co.jp/Ceramy/image/img/PDF/ENG/L0110S0101BLM18E.pdf, Filter Type="Differential Mode - Single", Height (Max)="0.037\" (0.95mm)", Mounting Type="Surface Mount", Packaging="Cut Tape (CT)", Pricing 1="1=0.33, 10=0.254, 50=0.1814, 100=0.1632, 250=0.13784, 500=0.12332, 1000=0.10519 (CAD)", RoHS="RoHS Compliant", Size / Dimension="0.063\" L x 0.031\" W (1.60mm x 0.80mm)", Stock 1=382631, Supplier 1=Digi-Key
LD1 LD2 LD3: "Low-Power Differential Line Driver And Receiver Pair", Manufacturer="Texas Instruments", PACKAGE_DESIGNATOR=D, Copyright="Copyright (C) 2018 Accelerated Designs. All rights reserved", Datasheet_URL=http://www.ti.com/lit/gpn/SN75LBC179, FAMILY_NAME=RS-485, GENERIC_PART_NUMBER=SN75LBC179, INDUSTRY_STD_PKG_TYPE=SOIC, Manufacturer_Part_Number=SN75LBC179D, PIN_COUNT=8, RefDes=RefDes, Type=DEV, Vendor="Texas Instruments"
P1: "Header, 5-Pin", LatestRevisionDate=17-Jul-2002, LatestRevisionNote="Re-released for DXP Platform.", Publisher="Altium Limited"
R1: library part 1M_5%_1206, "RES SMD 1M OHM 5% 1/4W 1206", Manufacturer="Panasonic Electronic Components", Manufacturer Part Number=ERJ-8GEYJ105V, Operating Temperature="-55°C ~ 155°C", Package / Case="1206 (3216 Metric)", Power (Watts)="0.25W, 1/4W", Supplier Device Package=1206, Supplier Part Number 1=P1.0MECT-ND, Temperature Coefficient=±200ppm/°C, Tolerance=±5%, Category=Resistors, ComponentLink1Description=http://industrial.panasonic.com/www-cgi/jvcr13pz.cgi?E+PZ+3+AOA0001+ERJ8GEYJ105V+7+WW, ComponentLink1URL=http://industrial.panasonic.com/www-cgi/jvcr13pz.cgi?E+PZ+3+AOA0001+ERJ8GEYJ105V+7+WW, Composition="Thick Film", Features="Automotive AEC-Q200", Height="0.028\" (0.70mm)", Number of Terminations=2, Packaging="Cut Tape (CT)", Pricing 1="1=0.14, 50=0.038, 100=0.029, 250=0.02152, 500=0.01588, 1000=0.01059, 2500=0.00894 (CAD)", Resistance (Ohms)=1M, RoHS="RoHS Compliant", Size / Dimension="0.126\" L x 0.063\" W (3.20mm x 1.60mm)", Stock 1=165352, Supplier 1=Digi-Key
R2 R3 R4 R5 R6 R7: library part 10k_1%_0402, "RES SMD 10K OHM 1% 1/10W 0402", Manufacturer="Panasonic Electronic Components", Manufacturer Part Number=ERJ-2RKF1002X, Operating Temperature="-55°C ~ 155°C", Package / Case="0402 (1005 Metric)", Power (Watts)="0.1W, 1/10W", Supplier Device Package=0402, Supplier Part Number 1=P10.0KLCT-ND, Temperature Coefficient=±100ppm/°C, Tolerance=±1%, Category=Resistors, ComponentLink1Description=http://industrial.panasonic.com/www-cgi/jvcr13pz.cgi?E+PZ+3+AOA0002+ERJ2RKF1002X+7+WW, ComponentLink1URL=http://industrial.panasonic.com/www-cgi/jvcr13pz.cgi?E+PZ+3+AOA0002+ERJ2RKF1002X+7+WW, Composition="Thick Film", Features="Automotive AEC-Q200", Height="0.016\" (0.40mm)", Number of Terminations=2, Packaging="Cut Tape (CT)", Pricing 1="1=0.14, 50=0.0282, 100=0.0215, 250=0.01592, 500=0.01176, 1000=0.00784, 5000=0.00551 (CAD)", Resistance (Ohms)=10k, RoHS="RoHS Compliant", Size / Dimension="0.039\" L x 0.020\" W (1.00mm x 0.50mm)", Stock 1=5818216, Supplier 1=Digi-Key
R8 R9: library part 27_1%_0402, "RES SMD 27 OHM 1% 1/10W 0402", Manufacturer="Panasonic Electronic Components", Manufacturer Part Number=ERJ-2RKF27R0X, Operating Temperature="-55°C ~ 155°C", Package / Case="0402 (1005 Metric)", Power (Watts)="0.1W, 1/10W", Supplier Device Package=0402, Supplier Part Number 1=P27.0LCT-ND, Temperature Coefficient=±100ppm/°C, Tolerance=±1%, Category=Resistors, ComponentLink1Description=http://industrial.panasonic.com/www-cgi/jvcr13pz.cgi?E+PZ+3+AOA0002+ERJ2RKF27R0X+7+WW, ComponentLink1URL=http://industrial.panasonic.com/www-cgi/jvcr13pz.cgi?E+PZ+3+AOA0002+ERJ2RKF27R0X+7+WW, Composition="Thick Film", Features="Automotive AEC-Q200", Height="0.016\" (0.40mm)", Number of Terminations=2, Packaging="Cut Tape (CT)", Pricing 1="1=0.16, 50=0.0234, 100=0.0171, 250=0.01308, 500=0.01048, 1000=0.00771, 5000=0.00553 (CAD)", Resistance (Ohms)=27, RoHS="RoHS Compliant", Size / Dimension="0.039\" L x 0.020\" W (1.00mm x 0.50mm)", Stock 1=490131, Supplier 1=Digi-Key
R13 R14: library part 120_1%_0402, "RES SMD 120 OHM 1% 1/10W 0402", Manufacturer="Panasonic Electronic Components", Manufacturer Part Number=ERJ-2RKF1200X, Operating Temperature="-55°C ~ 155°C", Package / Case="0402 (1005 Metric)", Power (Watts)="0.1W, 1/10W", Supplier Device Package=0402, Supplier Part Number 1=P120LCT-ND, Temperature Coefficient=±100ppm/°C, Tolerance=±1%, Category=Resistors, ComponentLink1Description=http://industrial.panasonic.com/www-cgi/jvcr13pz.cgi?E+PZ+3+AOA0002+ERJ2RKF1200X+7+WW, ComponentLink1URL=http://industrial.panasonic.com/www-cgi/jvcr13pz.cgi?E+PZ+3+AOA0002+ERJ2RKF1200X+7+WW, Composition="Thick Film", Features="Automotive AEC-Q200", Height="0.016\" (0.40mm)", Number of Terminations=2, Packaging="Cut Tape (CT)", Pricing 1="1=0.14, 50=0.0282, 100=0.0215, 250=0.01592, 500=0.01176, 1000=0.00784, 5000=0.00551 (CAD)", Resistance (Ohms)=120, RoHS="RoHS Compliant", Size / Dimension="0.039\" L x 0.020\" W (1.00mm x 0.50mm)", Stock 1=184236, Supplier 1=Digi-Key
R15 R16 R17 R18: library part 10k_1%_0402, "RES SMD 10K OHM 1% 1/10W 0402", Manufacturer="Panasonic Electronic Components", Manufacturer Part Number=ERJ-2RKF1002X, Operating Temperature="-55°C ~ 155°C", Package / Case="0402 (1005 Metric)", Power (Watts)="0.1W, 1/10W", Resistance (Ohms)=10k, Supplier Device Package=0402, Supplier Part Number 1=P10.0KLCT-ND, Temperature Coefficient=±100ppm/°C, Tolerance=±1%, Category=Resistors, ComponentLink1Description=http://industrial.panasonic.com/www-cgi/jvcr13pz.cgi?E+PZ+3+AOA0002+ERJ2RKF1002X+7+WW, ComponentLink1URL=http://industrial.panasonic.com/www-cgi/jvcr13pz.cgi?E+PZ+3+AOA0002+ERJ2RKF1002X+7+WW, Composition="Thick Film", Features="Automotive AEC-Q200", Height="0.016\" (0.40mm)", Number of Terminations=2, Packaging="Cut Tape (CT)", Pricing 1="1=0.14, 50=0.0282, 100=0.0215, 250=0.01592, 500=0.01176, 1000=0.00784, 5000=0.00551 (CAD)", RoHS="RoHS Compliant", Size / Dimension="0.039\" L x 0.020\" W (1.00mm x 0.50mm)", Stock 1=5818216, Supplier 1=Digi-Key
SSR SSR2: "Relay or Contactor", Manufacturer_Name="IXYS SEMICONDUCTOR", Mouser Part Number=849-CPC1017NTR, Arrow Part Number=CPC1017NTR, Arrow Price/Stock=https://www.arrow.com/en/products/cpc1017ntr/ixys, Datasheet Link=http://www.ixysic.com/home/pdfs.nsf/www/CPC1017N.pdf/$file/CPC1017N.pdf, Height=2.159mm, Manufacturer_Part_Number=CPC1017NTR, Mouser Price/Stock=https://www.mouser.co.uk/ProductDetail/IXYS-Integrated-Circuits/CPC1017NTR?qs=h2iAtNzNjMRlYN6IF%252Bl9JA%3D%3D
U1: "500 mA, Low Voltage, Low Quiescent Current LDO Regulator", Current - Limit (Min)=-, Current - Output=500mA, Manufacturer="Microchip Technology", Operating Temperature="-40°C ~ 125°C", Package / Case="TO-261-4, TO-261AA", Supplier Device Package=SOT-223-3, Supplier Part Number 1=MCP1825S-3302E/DB-ND, Voltage - Dropout (Typical)="0.21V @ 500mA", Voltage - Input="Up to 6V", Voltage - Output=3.3V, Category="Integrated Circuits (ICs)", ComponentLink1Description=http://www.microchip.com/mymicrochip/filehandler.aspx?ddocname=en531698, ComponentLink1URL=http://www.microchip.com/mymicrochip/filehandler.aspx?ddocname=en531698, Manufacturer Part Number=MCP1825S-3302E/DB, Mounting Type="Surface Mount", Number of Regulators=1, Packaging=Tube, Pricing 1="1=0.61, 10=0.51, 25=0.43, 100=0.39 (USD)", Regulator Topology="Positive Fixed", RoHS="RoHS Compliant", Stock 1=5172, Supplier 1=Digi-Key
U2: "Tiva TM4C123GH6PM Microcontroller ARM Cortex 80 MHz FPU", Supplier Part Number 1=296-35848-ND, Supplier 1=Digi-Key
U3: library part FT230XQ-R, "IC USB SERIAL BASIC UART 16QFN", Current - Supply=8mA, Manufacturer="FTDI, Future Technology Devices International Ltd", Operating Temperature="-40°C ~ 85°C", Package / Case="16-WQFN Exposed Pad", Supplier Device Package="16-QFN (4x4)", Supplier Part Number 1=768-1130-1-ND, Voltage - Supply="3.3 V ~ 5 V", Category="Integrated Circuits (ICs)", ComponentLink1Description=http://www.ftdichip.com/Support/Documents/DataSheets/ICs/DS_FT230X.pdf, ComponentLink1URL=http://www.ftdichip.com/Support/Documents/DataSheets/ICs/DS_FT230X.pdf, Function="Bridge, USB to UART", Interface=UART, Manufacturer Part Number=FT230XQ-R, Packaging="Cut Tape (CT)", Pricing 1="1=2.64, 25=2.5508, 100=2.4601, 250=2.21412, 500=1.994, 1000=1.89042, 2500=1.86128 (CAD)", Protocol=USB, RoHS="RoHS Compliant", Standards="USB 2.0", Stock 1=7567, Supplier 1=Digi-Key
USB1: library part "MOLEX 0670688010", Supplier Part Number 1=WM4064-ND, Supplier 1=Digi-Key
X1: library part 403C35E16M00000, "CRYSTAL 16MHZ 20PF SMD", ESR (Equivalent Series Resistance)="80 Ohm", Frequency=16MHz, Frequency Stability=±50ppm, Frequency Tolerance=±30ppm, Load Capacitance=20pF, Manufacturer="CTS-Frequency Controls", Operating Mode=Fundamental, Operating Temperature="-20°C ~ 70°C", Package / Case="4-SMD, No Lead (DFN, LCC)", Ratings=-, Supplier Part Number 1=CTX1293CT-ND, Category="Crystals and Oscillators", ComponentLink1Description=http://www.ctscorp.com/components/Datasheets/008-0288-0_F.pdf, ComponentLink1URL=http://www.ctscorp.com/components/Datasheets/008-0288-0_F.pdf, Height="0.031\" (0.80mm)", Manufacturer Part Number=403C35E16M00000, Mounting Type="Surface Mount", Packaging="Cut Tape (CT)", Pricing 1="1=1.07, 10=0.95, 50=0.8866, 100=0.7847, 500=0.7415, 750=0.70228, 1000=0.61988 (CAD)", RoHS="RoHS Compliant", Size / Dimension="0.126\" L x 0.098\" W (3.20mm x 2.50mm)", Stock 1=7029, Supplier 1=Digi-Key, Type="MHz Crystal"

## Via types
v1: diameter 30, hole 28, Top Layer to Bottom Layer, 107 vias
v2: diameter 50, hole 28, Top Layer to Bottom Layer, 4 vias
v3: diameter 30, hole 30, Top Layer to Bottom Layer, 1 vias

## Nets (pads, with @x,y where several pads share a name; then routed paths per layer and width w, separated by ;. In a path a pad name is that pad's centre, name@x,y a point inside that pad or via, vN(x,y) a via of type N, cw(c..) or ccw(c..) an arc to the next point about the centre after c; other vN are vias at no path point)
5VHS1: JH1.5 JSC1.6 | length 947.5
  Top Layer w15: JH1.5@2940,1865 2985,1820 3190.24,1820 3215,1795.25 3215,1660 3305,1570 3480,1570 3505,1595 3505,1695 JSC1.6@3555,1745
5VHS2: JH2.5 JSC2.6 | length 724.1
  Top Layer w8: JSC2.6@1600,2905 1560,2945 1560,3410 1586.02,3436.02 1671.02,3436.02 JH2.5@1728.11,3493.11
5VHS3: JH3.5 JSC3.6 | length 1654.6
  Bottom Layer w15: JSC3.6@2585,4325 2535,4375 2535,4525 2605,4595 3340.49,4595 3535.49,4400 3625,4400 3655,4370 3655,4258.78 JH3.5@3598.11,4201.89
+3.3V: C10.1 C11.1 C12.1 C13.2 C14.2 C15.2 C16.2 C17.2 C20.2 C28.2 C29.2 F1.1 R2.1 R3.1 R4.2 R5.2 R6.2 R7.2 R13.2 R14.2 R15.2 R16.2 R17.2 R18.2 U1.3 U2.11 U2.26 U2.37 U2.42 U2.54 U3.1 U3.8 U3.9 U3.10 | length 10791.5
  Top Layer w8: v1(3005,3855) v1@3015,3855 ; v1@3090,3510.15 v1(3090,3515) ; C17.2@3509.61,3197.28 C17.2@3516.89,3190 ; U2.26@3519.02,3434.69 U2.26@3519.02,3436.02 U2.26@3519.68,3435.36 ; R16.2@3667.72,3277.72 R16.2@3677.28,3277.72 ; 3675.04,3685.04 3681.27,3685.04 ; R3.1@4067.39,3280.89 4073.52,3284.68 R3.1@4075.46,3284.22 ; v1(4135,2850) v1@4135,2861.33 ; v1@4183.88,2615 v1(4190,2615) ; v1(4645,2876.44) v1@4645,2887.31
  Top Layer w10: v1@3516.24,3371.24 v1(3519.02,3371.24) ; U2.26@3519.02,3434.69 U2.26@3519.68,3435.36 ; 3534,3236.57 3535,3237.57 ; 3534,3263.43 3535,3262.43 ; 3681.27,3685.04 U2.42@3686.84,3685.04
  Top Layer w15: v1(2405,2330) 2405,2816.58 2908.66,3320.25 2908.66,3322.58 2954.7,3368.61 3096.68,3368.61 3118.07,3390 C13.2@3145,3390 v1@3212.21,3457.21 ; v1(2880.5,3490.98) 2880,3559.05 2972.84,3651.89 C14.2@3040,3651.89 ; v1@3090,3510.15 3107.91,3510.15 3204.06,3606.3 U2.11@3270,3606.3 ; R17.2@3108.12,3845 3065,3845 3055,3855 3015,3855 3047.5,3822.5 3088.46,3822.5 3108.99,3801.97 3161.94,3801.97 3165.02,3805.06 3178.21,3805.06 3194.07,3789.2 3194.07,3773.65 R18.2@3205,3762.72 ; F1.1@3353.29,4155 3362.08,4146.21 3571.07,4146.21 3592.28,4125 3592.28,4070.79 3576.5,4055 C16.2@3576.5,4015 3576.5,3988.35 3553.11,3964.97 3553.11,3926.26 3538.7,3911.85 U2.54@3538.7,3875 3538.7,3822.61 3681.27,3685.04 ; R15.2@3455,3197.28 C17.2@3509.61,3197.28 ; C17.2@3516.89,3190 3525,3198.11 3525,3227.57 3534,3236.57 ; U2.26@3519.02,3434.69 v1(3519.02,3371.24) 3519.02,3332.83 3534,3317.84 3534,3263.43 ; U2.26@3519.02,3436.02 3519.02,3479.13 3626.5,3586.61 3678.39,3586.61 ; 3535,3237.57 3535,3262.43 ; 3675.04,3685.04 3667.72,3677.72 3667.72,3597.28 3678.39,3586.61 ; R16.2@3677.28,3277.72 3710,3245 v1(3710,3195) ; U2.42@3686.84,3685.04 U2.42@3708.98,3685.04 U2.42@3713.98,3685.04 ; v1(3900,2946.82) 3825,3021.82 3825,3055 3945,3175 v1@4146.21,3175 ; R3.1@4067.39,3280.89 4019.2,3292.28 4002.72,3292.28 3860,3435 3860,3450 3842.59,3467.41 3842.2,3467.41 3834.3,3475.31 3834.3,3475.7 3750,3560 3750,3575 3744.58,3580.42 3744.58,3580.6 3738.57,3586.61 U2.37@3708.98,3586.61 3678.39,3586.61 ; R3.1@4075.46,3284.22 4133.96,3320.34 4139.79,3345 v1(4190,3345) ; v1(4135,2850) 4135,2663.88 v1@4183.88,2615 ; v1@4607.5,2952.5 4622.5,2937.5 4622.5,2909.81 v1@4645,2887.31
  Bottom Layer w8: C10.1@2312.83,2375.67 C10.1@2315,2377.83 ; v1@3090,3510.2 v1(3090,3515) ; v1@3512.37,3365.04 3518.57,3371.24 v1(3519.02,3371.24) ; C28.2@4250,2708.78 C28.2@4256.22,2715 ; 4442.76,3053.11 4442.76,3054.17 ; R6.2@4535,3055 R6.2@4540,3055 ; v1@4593.84,2965 v1(4606.89,2965) ; v1@4636.21,2867.65 v1(4645,2876.44)
  Bottom Layer w10: 3499.88,3372.35 v1@3507.19,3365.04 ; R4.2@4405.83,3005 4405.83,3016.18 ; R6.2@4530,3055 R6.2@4535,3055
  Bottom Layer w15: C12.1@2100,2397.44 2127.01,2397.44 2148.78,2375.67 C11.1@2190,2375.67 C10.1@2312.83,2375.67 ; C10.1@2315,2377.83 2357.17,2377.83 v1(2405,2330) 2435,2300 2640,2300 2699.17,2359.17 U1.3@2699.17,2374.45 ; v1(2880.5,3490.98) v1@3090,3510.15 ; v1@3090,3510.2 3142.57,3457.63 v1(3211.79,3457.63) 3211.79,3416.02 3255.46,3372.35 3499.88,3372.35 ; v1@3507.19,3365.04 v1@3512.37,3365.04 ; v1(3900,2946.82) 3972.18,3019 4016,3019 4032.72,3002.28 R13.2@4032.72,2990 ; v1(4135,2850) 4196.22,2850 C29.2@4238.11,2891.89 ; v1(4160,3172.6) 4160,3315 v1(4190,3345) ; v1@4188.14,2616.86 4250,2678.71 C28.2@4250,2708.78 ; U3.8@4349.4,2777.87 U3.9@4312.99,2814.28 U3.10@4312.99,2839.87 4284.83,2839.87 4171.51,2726.56 3868.29,2726.56 3676,2918.85 3676,2966 3690,2980 3788.45,2980 3873.45,3065 4415.73,3065 4455.73,3105 4539.17,3105 4599.37,3044.8 4599.37,3014.47 U3.1@4475.96,2891.05 ; 4405.83,3016.18 4442.76,3053.11 ; 4442.76,3054.17 4473.58,3085 4510.31,3085 4523.89,3071.42 4523.89,3071.11 R6.2@4540,3055 ; R6.2@4535,3055 4535,2994.47 4462.59,2922.06 U3.1@4462.59,2891.05 U3.1@4475.96,2891.05 ; v1@4593.84,2965 4588.89,2965 4514.94,2891.05 U3.1@4475.96,2891.05 ; v1@4636.21,2867.65 R5.2@4567.72,2867.65 4605.99,2905.92 4625.72,2905.92 4644.8,2925 4747.72,2925 R14.2@4875,2797.72 ; v1(4645,2876.44) 4685,2836.44 R7.2@4685,2815
+5V: C4.2 C5.2 C6.2 C7.1 C8.1 C9.2 JEn1.1 JEn2.1 JEn3.1 L1.2 LD1.1 LD2.1 LD3.1 U1.1 | length 6949.7
  Top Layer w8: C5.2@4728.11,2241.89 C5.2@4730,2243.78 ; C4.2@4843.11,2243.78 C4.2@4845,2241.89 C4.2@4845,2246.89
  Top Layer w15: LD1.1@2507,1895 2526.09,1895 2571.09,1940 3305,1940 v1(3355,1990) 3475,1870 v1(3570,1870) ; L1.2@4487.56,2175 4538.11,2175 C6.2@4605,2241.89 C5.2@4728.11,2241.89 ; C5.2@4730,2243.78 C4.2@4843.11,2243.78 ; C4.2@4845,2241.89 4845,2220 v1(5085,1980)
  Top Layer w20: LD2.1@2482,3510 2390,3418 2390,3375 2485,3280 2505,3300 v1(2505,3307.34) ; LD3.1@4378,3820 4410,3852 4410,4205 4470,4265 4470,4500 4515,4545 4990,4545 5035,4500 JEn3.1@5035,4420
  Bottom Layer w8: C7.1@2930,2572.17 C7.1@2935,2567.17
  Bottom Layer w15: v1(3570,1870) 3705,1870 3868.29,1706.71 3868.29,1561.71 3970,1460 4705,1460 5085,1840 v1(5085,1980)
  Bottom Layer w20: v1(2565,2831.37) 2565,2689.72 U1.1@2699.17,2555.55 ; C7.1@2935,2567.17 C8.1@3070,2567.17 3169.06,2567.17 C9.2@3195,2541.22 3233.78,2541.22 3335,2440 3335,2410.15 3354,2391.15 3354,2005
+24V: JBP.1 JBP.2 JSC1.1 JSC2.1 JSC3.1 SSR2.4 SSR.4 | length 1649.8
  Top Layer w20: SSR.4@4175,3641.73 4175,3752.61 v2@4245,3822.61 ; SSR2.4@4690,3320 4765,3395 v1(4835,3395)
  Bottom Layer w15: JSC2.1@1500,3105 1429.72,3034.72 1429.72,2950.53 1450,2930.25 1450,2745 1545,2650 1545,2235 1710,2070 JBP.2@1710,1986.3
  other v2: 4255,3824.23
+A3.3V: C21.2 C22.2 C23.2 F1.2 U2.2 | length 956.8
  Top Layer w8: v1(3110,4069.73) 3110,4064.46 v1@3115,4059.46 ; C23.2@3252.56,4215 3257.86,4215 F1.2@3317.86,4155
  Top Layer w10: C21.2@3033.11,4035 3090.54,4035 v1@3115,4059.46 ; v1(3110,4069.73) 3150.42,4069.73 3160.15,4060 3255.15,4155 F1.2@3317.86,4155 ; v1(3195,3995.81) 3195,3980 3150,3935 3150,3887.48 3151.95,3885.53 3160.91,3885.53 3167.35,3879.08 3167.35,3870.13 3217.43,3820.06 3299.16,3820.06 3305.61,3813.61 3305.61,3792.69 3296.38,3783.46 U2.2@3270,3783.46
  Bottom Layer w10: v1(3110,4069.73) 3129.73,4050 3155,4050 3170,4035 3170,4006.63 3180.81,3995.81 v1(3195,3995.81)
CF1M1: JSC1.2 U2.44 | length 2840.8
  Top Layer w10: U2.44@3708.98,3724.41 3737.56,3724.41 3875.8,3862.65 v1(3875.8,3943.81)
  Bottom Layer w10: JSC1.2@3355,1745 3375,1745 3580,1950 3580,2404.71 3710,2534.71 3710,2646.13 3580,2776.13 3580,2951.57 3693.43,3065 3695,3065 3800,3170 3800,3820 3876.61,3896.61 3875.8,3897.43 v1(3875.8,3943.81)
CF1M2: JSC2.2 U2.9 | length 1966.7
  Top Layer w8: JSC2.2@1600,3105 1685,3020 2528.43,3020 2858.66,3350.23 2858.66,3352.8 3116,3610.14 3116,3612.01 3132.99,3629 3134.86,3629 3150.86,3645
  Top Layer w10: 3150.86,3645 U2.9@3270,3645
CF1M3: JSC3.2 U2.6 | length 977.1
  Top Layer w10: v1(3096.68,3700) 3128.74,3700 3129.74,3701 3134.45,3701 3138.53,3705.09 U2.6@3270,3705.09
  Bottom Layer w8: JSC3.2@2785,4325 JSC3.2@2800,4340
  Bottom Layer w10: JSC3.2@2785,4325 2785,4078.56 2815.25,4048.32 2815.25,4005.63 2840.53,3980.35 2840.53,3959.47 2885,3915 2902.43,3915 2920,3897.43 2920,3879.97 3009.97,3790 3037.6,3790 3061.03,3766.57 3061.03,3738.97 3096.68,3703.32 v1(3096.68,3700)